# EAGLE board example (EAGLE 5.07)
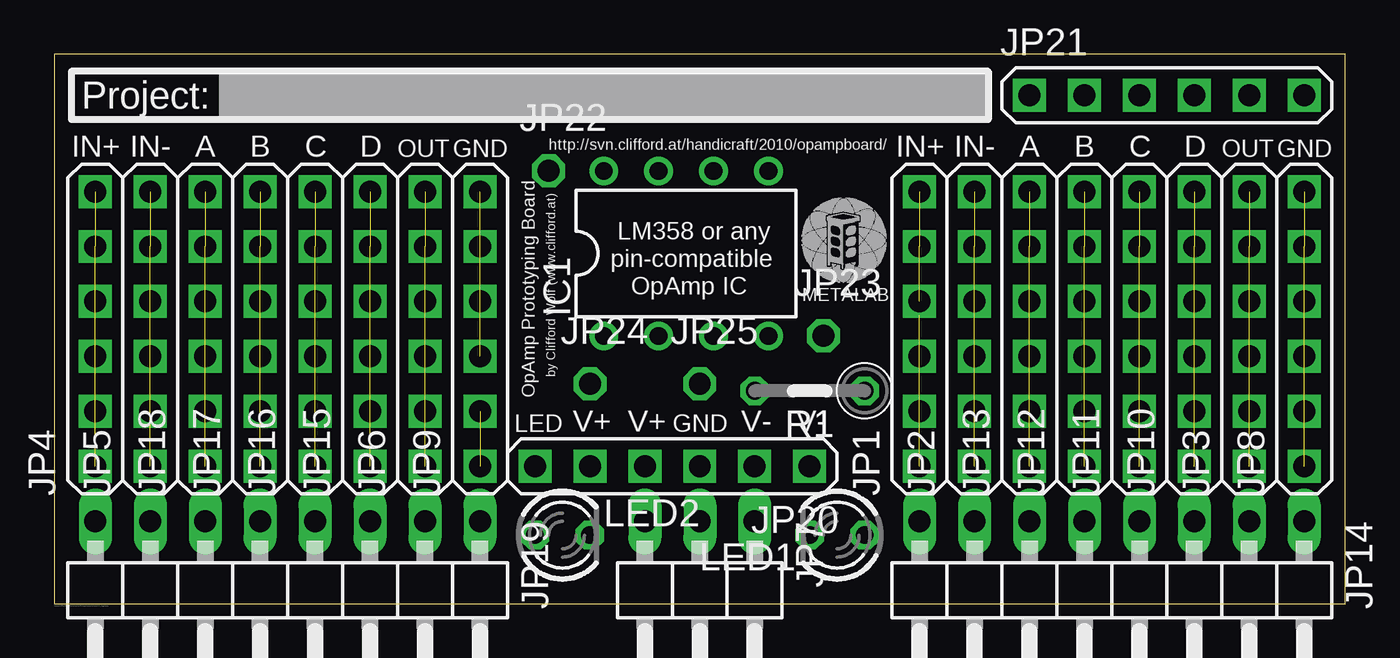
[diagram p0: board, top side]
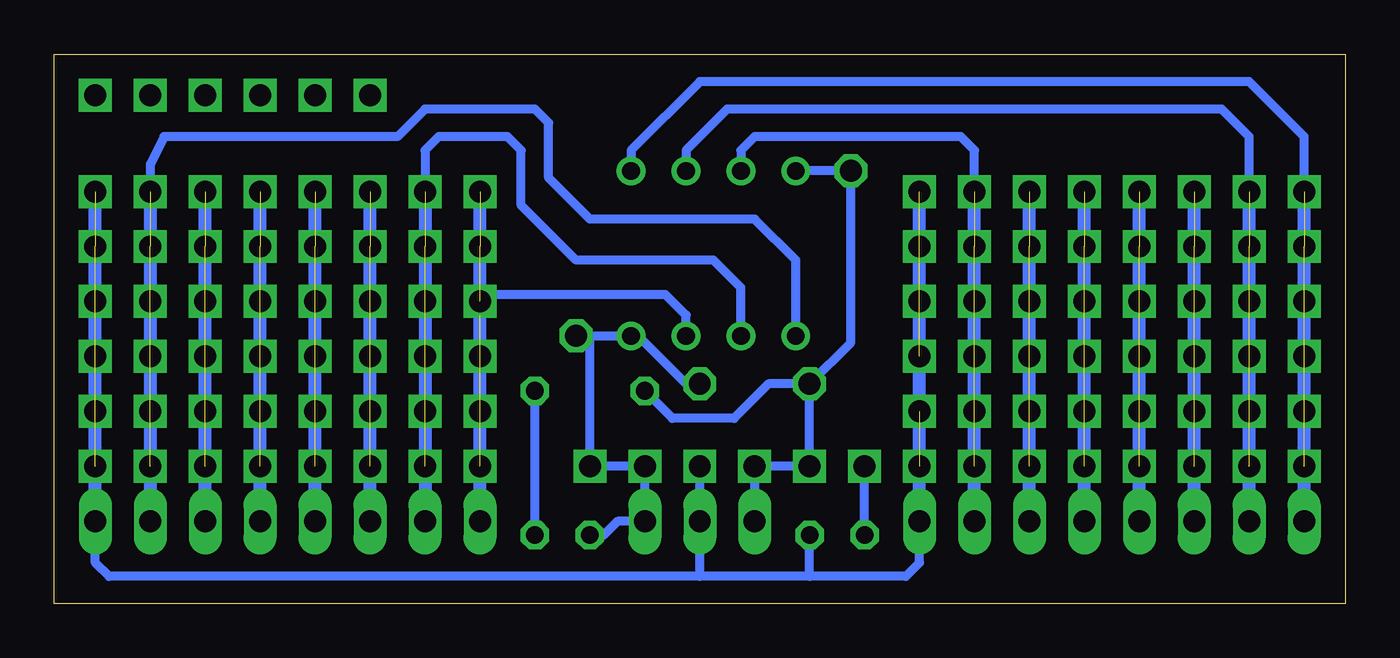
[diagram p1: board, bottom side, seen from below]

Size 59.69 x 25.4 mm. Coordinates in mm from the lower left corner, seen from the top.
Outline: 0,0 59.69,0 59.69,25.4 0,25.4 0,0
Copper layers (1*16): Top 0.035mm / dielectric 1.5mm / Bottom 0.035mm
Design rules "default *": minimum track width 10mil, minimum drill 24mil, track to track 8mil, track to pad 8mil, pad to pad 8mil, via to via 8mil, smd to smd 8mil, copper to edge 10mil, drill to drill 8mil, minimum pad ring 10mil, minimum via ring 8mil, stop-mask expansion 4mil, vias tented up to drill 0mil, thermal gap 10mil

## Footprints (pad centres in the part's own frame; a part is rotated, then mirrored left to right if it is on the bottom)
DIL08 = drill 0.813 pad 1.27 round: 1 -3.81,-3.81; 2 -1.27,-3.81; 3 1.27,-3.81; 4 3.81,-3.81; 5 3.81,3.81; 6 1.27,3.81; 7 -1.27,3.81; 8 -3.81,3.81
1X06 = drill 1.016 square: 1 -6.35,0; 2 -3.81,0; 3 -1.27,0; 4 1.27,0; 5 3.81,0; 6 6.35,0
1X03/90 = drill 1.016 long: 1 -2.54,-3.81; 2 0,-3.81; 3 2.54,-3.81
1X08/90 = drill 1.016 long: 1 -8.89,-3.81; 2 -6.35,-3.81; 3 -3.81,-3.81; 4 -1.27,-3.81; 5 1.27,-3.81; 6 3.81,-3.81; 7 6.35,-3.81; 8 8.89,-3.81
1X01 = drill 1.016 octagon: 1 0,0
LED3MM = drill 0.813 octagon: A -1.27,0; K 1.27,0
0207/5V = drill 0.813 octagon: 1 -2.54,0; 2 2.54,0

## Placement (x,y rotation side)
IC1  [DIL08]  29.21,16.19 0 top
JP1  [1X06]  40.01,12.7 90 top
JP2  [1X06]  42.55,12.7 90 top
JP3  [1X06]  55.24,12.7 90 top
JP4  [1X06]  1.91,12.7 90 top
JP5  [1X06]  4.45,12.7 90 top
JP6  [1X06]  17.14,12.7 90 top
JP7  [1X03/90]  29.84,0 180 top
JP8  [1X06]  57.78,12.7 90 top
JP9  [1X06]  19.68,12.7 90 top
JP10  [1X06]  52.7,12.7 90 top
JP11  [1X06]  50.16,12.7 90 top
JP12  [1X06]  47.62,12.7 90 top
JP13  [1X06]  45.09,12.7 90 top
JP14  [1X08/90]  48.9,0 180 top
JP15  [1X06]  14.61,12.7 90 top
JP16  [1X06]  12.06,12.7 90 top
JP17  [1X06]  9.53,12.7 90 top
JP18  [1X06]  6.99,12.7 90 top
JP19  [1X08/90]  10.79,0 180 top
JP20  [1X06]  28.57,6.35 180 top
JP21  [1X06]  51.44,23.5 0 top
JP22  [1X01]  22.86,20 0 top
JP23  [1X01]  35.56,12.38 0 top
JP24  [1X01]  24.77,10.16 0 top
JP25  [1X01]  29.84,10.16 0 top
LED1  [LED3MM]  36.2,3.17 180 top
LED2  [LED3MM]  23.5,3.17 0 top
R1  [0207/5V]  34.92,9.84 180 top

## Library data of the parts
IC1 = linear
JP1-JP6 JP8-JP13 JP15-JP18 JP20-JP25 = library
JP7 JP14 JP19 = pinhead
LED1 LED2 = led
R1 = resistor

## Nets
GND: JP7.2 JP8.1 JP8.2 JP8.3 JP8.4 JP8.5 JP8.6 JP9.1 JP9.2 JP9.3 JP9.4 JP9.5 JP9.6 JP14.1 JP19.1 JP20.3 LED2.K
N$1: IC1.3 JP1.1 JP1.2 JP1.3 JP1.4 JP1.5 JP1.6 JP14.8
N$2: IC1.2 JP2.1 JP2.2 JP2.3 JP2.4 JP2.5 JP2.6 JP14.7
N$3: IC1.1 JP3.1 JP3.2 JP3.3 JP3.4 JP3.5 JP3.6 JP14.2
N$4: IC1.5 JP4.1 JP4.2 JP4.3 JP4.4 JP4.5 JP4.6 JP19.8
N$5: IC1.6 JP5.1 JP5.2 JP5.3 JP5.4 JP5.5 JP5.6 JP19.7
N$6: IC1.7 JP6.1 JP6.2 JP6.3 JP6.4 JP6.5 JP6.6 JP19.2
N$7: IC1.4 JP7.1 JP20.1 JP20.2 JP23.1 JP25.1 LED1.K
N$8: IC1.8 JP7.3 JP20.4 JP20.5 JP22.1 JP24.1 R1.2
N$9: LED1.A R1.1
N$10: JP11.1 JP11.2 JP11.3 JP11.4 JP11.5 JP11.6 JP14.4
N$11: JP10.1 JP10.2 JP10.3 JP10.4 JP10.5 JP10.6 JP14.3
N$12: JP12.1 JP12.2 JP12.3 JP12.4 JP12.5 JP12.6 JP14.5
N$13: JP13.1 JP13.2 JP13.3 JP13.4 JP13.5 JP13.6 JP14.6
N$14: JP15.1 JP15.2 JP15.3 JP15.4 JP15.5 JP15.6 JP19.3
N$15: JP16.1 JP16.2 JP16.3 JP16.4 JP16.5 JP16.6 JP19.4
N$16: JP17.1 JP17.2 JP17.3 JP17.4 JP17.5 JP17.6 JP19.5
N$17: JP18.1 JP18.2 JP18.3 JP18.4 JP18.5 JP18.6 JP19.6
N$18: JP20.6 LED2.A

## Tracks (layer width: path | path; a pad name or v marks a point on that pad's centre or on a via)
GND  (9 unrouted)
  Bottom 0.406: 29.84,1.27 57.15,1.27 57.78,1.91 JP14.1 | 29.84,1.27 JP7.2 JP20.3 | 24.77,1.27 20.32,1.27 19.68,1.91 JP19.1 | 24.77,1.27 29.84,1.27 | 24.77,1.27 LED2.K
  Bottom 0.61: JP9.6 JP9.1 JP19.1 | JP14.1 JP8.6
N$1  (5 unrouted)
  Bottom 0.406: IC1.3 30.48,13.34 31.43,14.29 40.01,14.29 | JP1.4 40.01,13.34
  Bottom 0.61: JP14.8 JP1.4 40.01,14.29 JP1.6
N$2  (5 unrouted)
  Bottom 0.406: IC1.2 27.94,14.61 29.21,15.88 35.56,15.88 38.1,18.41 38.1,20.95 38.73,21.59 41.91,21.59 42.55,20.95 JP2.6
  Bottom 0.61: JP2.6 JP14.7
N$3  (5 unrouted)
  Bottom 0.406: IC1.1 25.4,15.88 27.3,17.78 34.92,17.78 36.83,19.68 36.83,22.23 37.47,22.86 42.55,22.86 43.81,21.59 54.61,21.59 55.24,20.32 JP3.6
  Bottom 0.61: JP3.6 JP14.2
N$4  (5 unrouted)
  Bottom 0.406: IC1.5 33.02,20.95 29.84,24.13 4.45,24.13 1.91,21.59 JP4.6
  Bottom 0.61: JP19.8 JP4.6
N$5  (5 unrouted)
  Bottom 0.406: IC1.6 30.48,20.95 28.57,22.86 5.71,22.86 4.45,21.59 JP5.6
  Bottom 0.61: JP19.7 JP5.6
N$6  (5 unrouted)
  Bottom 0.406: IC1.7 27.94,20.95 27.3,21.59 17.78,21.59 17.14,20.95 JP6.6
  Bottom 0.61: JP19.2 JP6.6
N$7
  Bottom 0.406: LED1.K 34.29,3.17 33.66,3.81 JP7.1 JP20.2 JP20.1 34.92,12.38 | 34.92,12.38 JP23.1 | JP25.1 30.48,10.16 32.7,12.38 IC1.4 33.66,12.38 34.92,12.38
N$8
  Bottom 0.406: JP24.1 22.86,12.06 JP22.1 IC1.8 | JP7.3 JP20.4 JP20.5 JP24.1 | JP24.1 26.67,10.16 28.26,8.57 31.11,8.57 R1.2
N$9
  Bottom 0.406: LED1.A R1.1
N$10  (5 unrouted)
  Bottom 0.61: JP14.4 JP11.6
N$11  (5 unrouted)
  Bottom 0.61: JP14.3 JP10.6
N$12  (5 unrouted)
  Bottom 0.61: JP14.5 JP12.6
N$13  (5 unrouted)
  Bottom 0.61: JP14.6 JP13.6
N$14  (5 unrouted)
  Bottom 0.61: JP19.3 JP15.6
N$15  (5 unrouted)
  Bottom 0.61: JP19.4 JP16.6
N$16  (5 unrouted)
  Bottom 0.61: JP19.5 JP17.6
N$17  (5 unrouted)
  Bottom 0.61: JP19.6 JP18.6
N$18
  Bottom 0.406: LED2.A JP20.6

## Text on the board
tPlace: Project: | IN+ | IN- | A | B | C | D | OUT | GND | http://svn.clifford.at/handicraft/2010/opampboard/ | IN+ | IN- | A | B | C | D | OUT | GND | LM358 or any | pin-compatible | OpAmp IC | METALAB | OpAmp Prototyping Board | by Clifford Wolf (www.clifford.at) | LED | V+ | V+ | GND | V- | V- | /home/clifford/Work/handicraft/2010/opampboard/metalab_logo.bmp